# EAGLE board Otherduino5r (EAGLE 7.0.0)
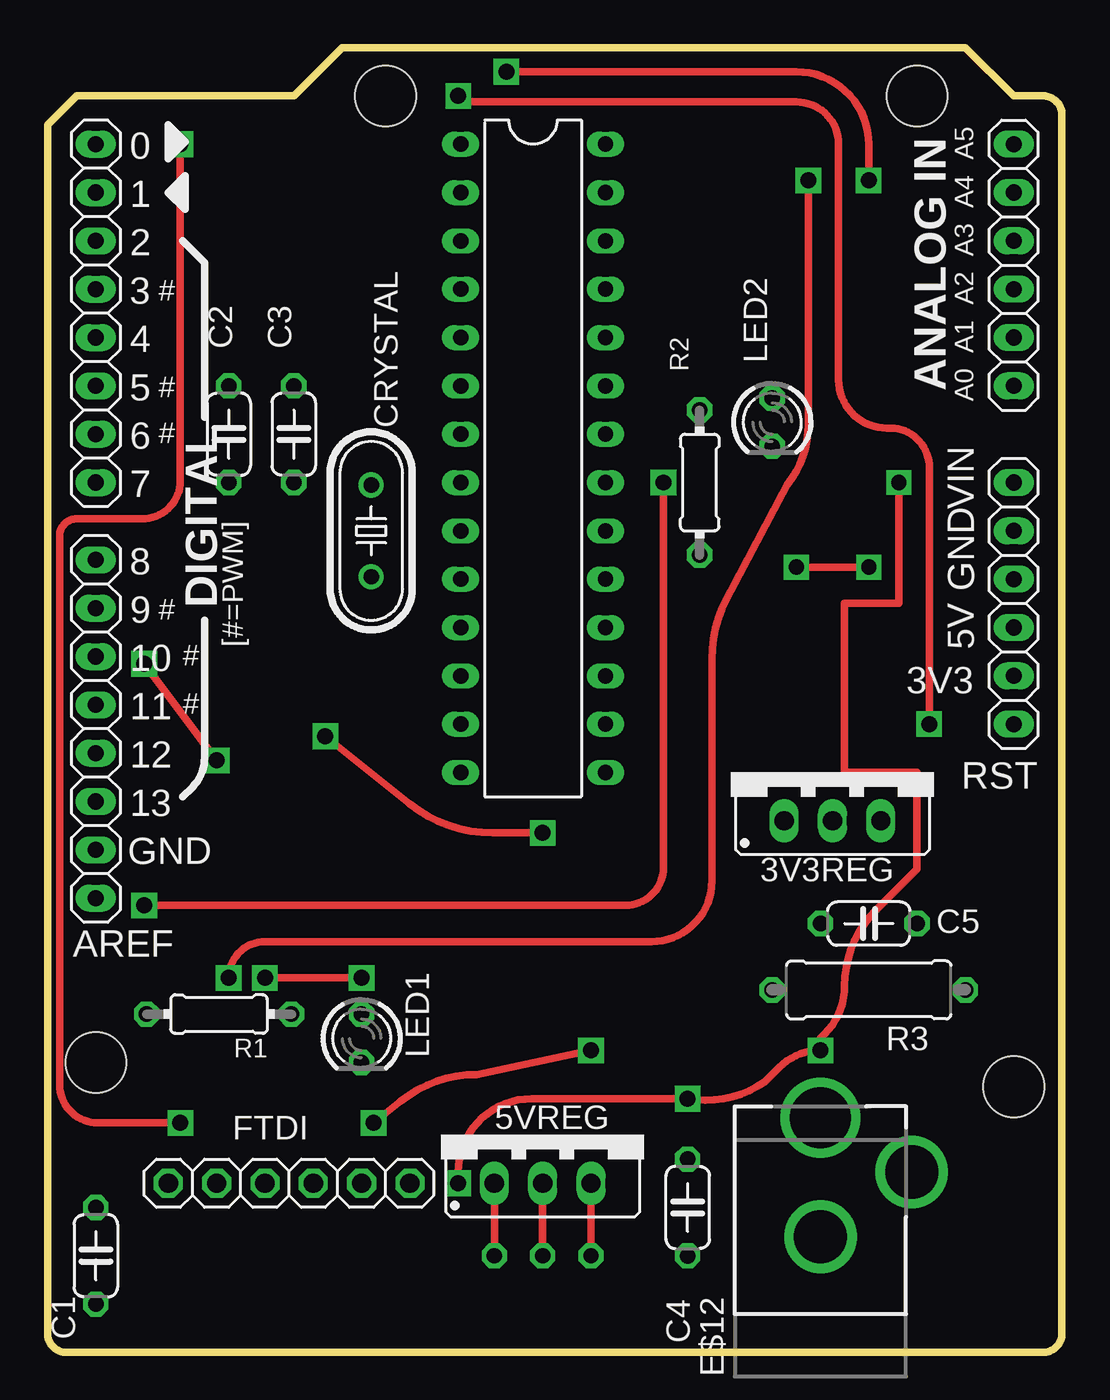
[diagram p0: board, top side]
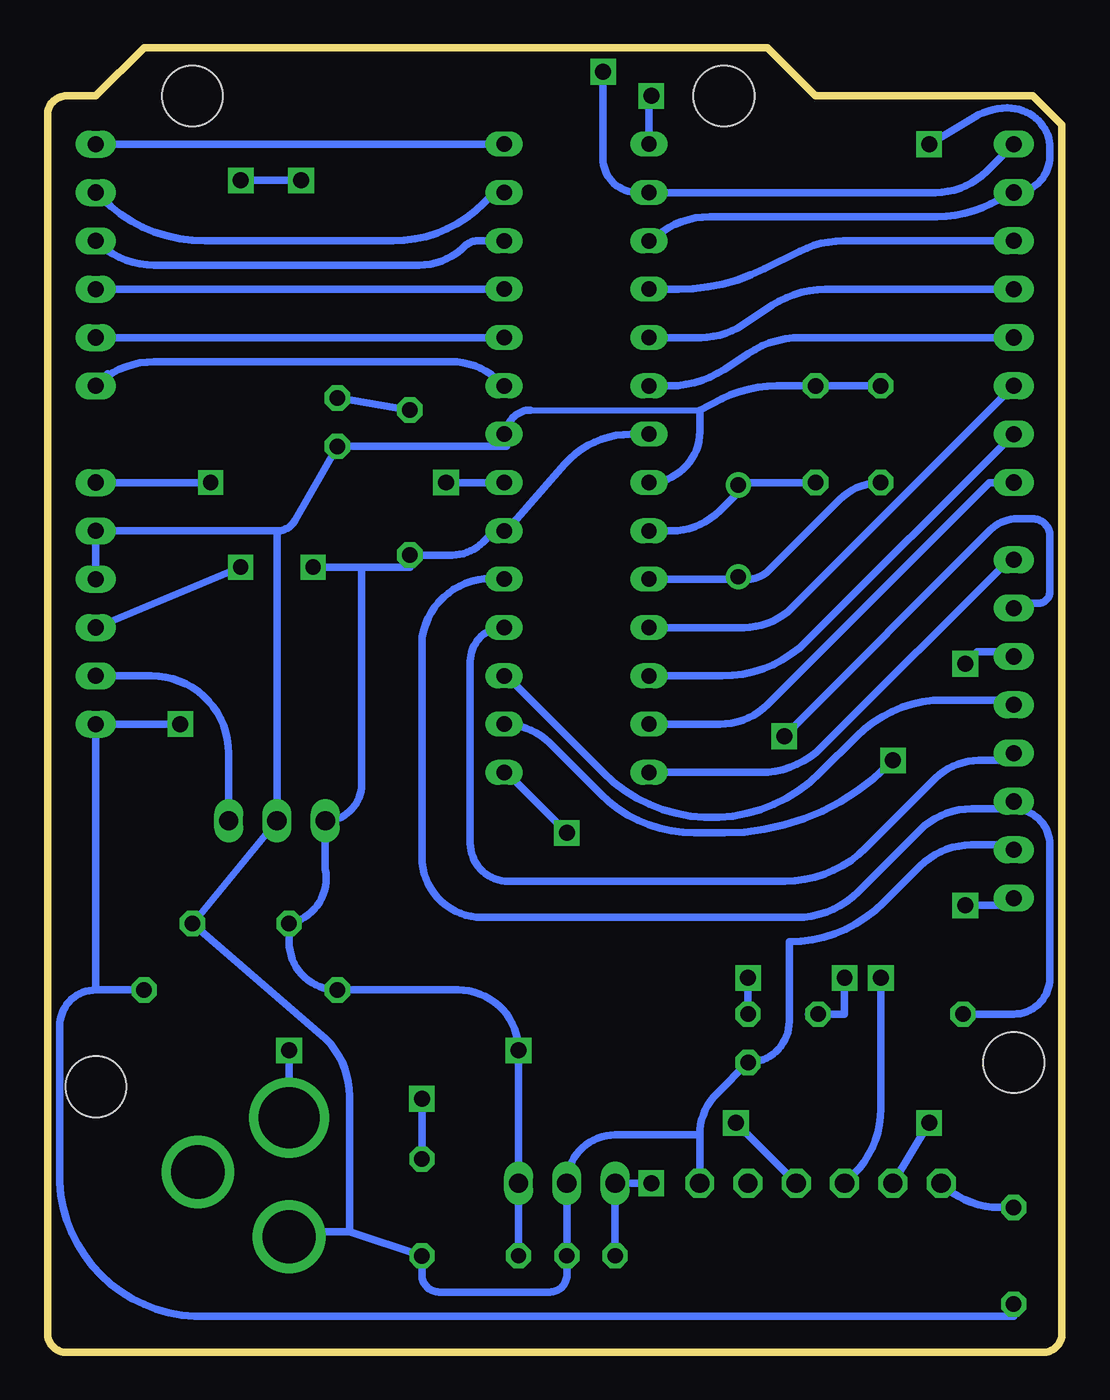
[diagram p1: board, bottom side, seen from below]

Size 53.34 x 68.58 mm. Coordinates in mm from the lower left corner, seen from the top.
Outline: 0,64.52 1.52,66.04 12.95,66.04 15.49,68.58 48.26,68.58 50.8,66.04 52.34,66.04 arc-90 53.34,65.04 53.34,1 arc-90 52.34,0 1,0 arc-90 0,1 0,64.52
Copper layers (1*16): Top 0.035mm / dielectric 1.5mm / Bottom 0.035mm
Design rules "Othermill64th": minimum track width 16mil, minimum drill 33mil, track to track 17mil, track to pad 17mil, pad to pad 17mil, via to via 17mil, smd to smd 0mil, copper to edge 0mil, drill to drill 12mil, minimum pad ring 10mil, minimum via ring 10mil, stop-mask expansion 1mil, vias tented up to drill 30mil, thermal gap 10mil
Net classes: 0 default: width 0.254 mm, clearance 0.254 mm; 1 power: width 0.61 mm, drill 0.61 mm, clearance 0.254 mm; 2 gnd: width 0.305 mm, drill 0.559 mm, clearance 0.254 mm; 3 usbvcc: width 0.508 mm, drill 0.61 mm, clearance 0.254 mm; 4 aref: width 0.406 mm, drill 0.61 mm, clearance 0.254 mm
Holes 3.2 mm at 50.8,13.97 2.54,15.24 17.78,66.04 45.72,66.04
tRestrict: area 1.4,23.1 to 3.7,24.6; area 1.4,25.7 to 3.7,27.2; area 1.4,28.2 to 3.7,29.7; area 1.4,30.7 to 3.7,32.3; area 1.4,30.7 to 3.7,32.3; area 1.4,33.3 to 3.7,34.8; area 1.4,35.8 to 3.7,37.3; area 1.4,38.4 to 3.7,39.9; area 1.4,40.9 to 3.7,42.4; area 1.4,45 to 3.7,46.5; area 1.4,45 to 3.7,46.5; area 1.4,47.5 to 3.7,49; 87 more areas

## Footprints (pad centres in the part's own frame; a part is rotated, then mirrored left to right if it is on the bottom)
78XXS = drill 1.016 long: GND 0,-2.54; IN -2.54,-2.54; OUT 2.54,-2.54
1X06 = drill 0.85 pad 1.422 long: 1 -6.35,0; 2 -3.81,0; 3 -1.27,0; 4 1.27,0; 5 3.81,0; 6 6.35,0
C050-024X044 = drill 0.813 octagon: 1 -2.54,0; 2 2.54,0
HC49/S = drill 0.813: 1 -2.413,0; 2 2.413,0
DCJACK_2MM_PTH = drill 2.8: GND 0,7.35; GNDBREAK 4.8,10.75 | drill 3.2: PWR 0,13.6
1X06' = drill 1.016 octagon: 1 -6.35,0; 2 -3.81,0; 3 -1.27,0; 4 1.27,0; 5 3.81,0; 6 6.35,0
1X08 = drill 0.85 pad 1.422 long: 1 -8.89,0; 2 -6.35,0; 3 -3.81,0; 4 -1.27,0; 5 1.27,0; 6 3.81,0; 7 6.35,0; 8 8.89,0
LED3MM = drill 0.813 octagon: A -1.27,0; K 1.27,0
0204/7 = drill 0.813 octagon: 1 -3.81,0; 2 3.81,0
0309/10 = drill 0.813 octagon: 1 -5.08,0; 2 5.08,0
DIL28-3 = drill 0.813 long: 1 -16.51,-3.81; 2 -13.97,-3.81; 3 -11.43,-3.81; 4 -8.89,-3.81; 5 -6.35,-3.81; 6 -3.81,-3.81; 7 -1.27,-3.81; 8 1.27,-3.81; 9 3.81,-3.81; 10 6.35,-3.81; 11 8.89,-3.81; 12 11.43,-3.81; 13 13.97,-3.81; 14 16.51,-3.81; 15 16.51,3.81; 16 13.97,3.81; 17 11.43,3.81; 18 8.89,3.81; 19 6.35,3.81; 20 3.81,3.81; 21 1.27,3.81; 22 -1.27,3.81; 23 -3.81,3.81; 24 -6.35,3.81; 25 -8.89,3.81; 26 -11.43,3.81; 27 -13.97,3.81; 28 -16.51,3.81

## Placement (x,y rotation side)
3V3REG  [78XXS]  41.27,30.48 0 top
5VREG  [78XXS]  26.04,11.43 0 top
AD  6x1F-H8.5  [1X06]  50.8,57.15 90 top
AD1  6x1F-H8.5  [1X06]  50.8,39.37 90 top
C1  0.1uF  [C050-024X044]  2.54,5.08 90 top
C2  22pF  [C050-024X044]  9.52,48.26 90 top
C3  22pF  [C050-024X044]  12.95,48.26 90 top
C4  10uF  [C050-024X044]  33.66,7.62 270 top
C5  10uF  [C050-024X044]  43.18,22.54 0 top
CRYSTAL  16MHz  [HC49/S]  17.02,43.18 270 top
E$12  [DCJACK_2MM_PTH]  40.64,-1.27 0 top
FTDI  [1X06']  12.7,8.89 180 top
IOL  8x1F-H8.5  [1X08]  2.54,54.61 270 top
IOL1  8x1F-H8.5  [1X08]  2.54,32.77 270 top
LED1  [LED3MM]  16.51,16.51 270 top
LED2  [LED3MM]  38.1,48.9 270 top
R1  220  [0204/7]  9.02,17.78 180 top
R2  220  [0204/7]  34.29,45.72 270 top
R3  10k  [0309/10]  43.18,19.05 0 top
ZU4  ATMEGA328P-PU  [DIL28-3]  25.53,46.99 270 top

## Library data of the parts
3V3REG 5VREG = v-reg
AD AD1 IOL IOL1 = SmartPrj
C1-C5 CRYSTAL E$12 FTDI R3 ZU4 = adafruit
LED1 LED2 = led
R1 R2 = rcl

## Nets
S$1: LED1.A R1.1
S$2: IOL.3 ZU4.4
S$4: FTDI.5 IOL.2 ZU4.3
S$5: IOL.4 ZU4.5
S$6: IOL.5 ZU4.6
S$9: C3.1 CRYSTAL.1 ZU4.9
S$10: 3V3REG.OUT AD1.2
S$11: 5VREG.IN AD1.6 C4.1 E$12.PWR
S$14: C2.1 CRYSTAL.2 ZU4.10
S$16: IOL.7 ZU4.12
S$17: IOL.8 ZU4.13
S$18: IOL1.1 ZU4.14
S$19: IOL1.2 ZU4.15
S$20: IOL1.3 ZU4.16
S$21: IOL1.4 ZU4.17
S$22: IOL1.5 ZU4.18
S$23: IOL1.6 R1.2 ZU4.19
S$24: AD.1 ZU4.23
S$25: AD.2 ZU4.24
S$26: AD.3 ZU4.25
S$27 [gnd]: 3V3REG.GND 5VREG.GND AD1.4 AD1.5 C2.2 C3.2 C4.2 C5.2 E$12.GND FTDI.1 IOL1.7 LED1.K LED2.K ZU4.8
S$28: AD.4 ZU4.26
S$29: AD.5 ZU4.27
S$30: AD.6 ZU4.28
S$31: IOL.6 ZU4.11
S$32: C1.2 FTDI.6
S$33: 3V3REG.IN 5VREG.OUT AD1.3 C5.1 FTDI.3 R2.2 R3.1 ZU4.7 ZU4.20
S$34: IOL1.8 ZU4.21
S$38: LED2.A R2.1
S$40: AD1.1 C1.1 R3.2 ZU4.1
S$42: FTDI.4 IOL.1 ZU4.2

## Tracks (layer width: path | path; a pad name or v marks a point on that pad's centre or on a via)
S$1  (via drill 0.84)
  Top 0.406: v11.43,19.69 v16.51,19.69
  Bottom 0.406: v16.51,19.69 LED1.A | v11.43,19.69 11.43,17.78 R1.1 13.34,17.78
S$2
  Bottom 0.406: ZU4.4 20.18,55.88 arc-27 15.64,56.95 13.77,57.88 arc27 11.5,58.42 IOL.3
S$4  (via drill 0.84)
  Top 0.406: v6.99,12.07 2.64,12.07 arc-90 0.63,14.07 0.63,42.92 arc-90 1.53,43.81 4.98,43.81 arc90 6.99,45.82 v6.99,63.5
  Bottom 0.406: ZU4.3 21.59,58.42 arc45 18.52,59.69 6.58,59.69 arc-27 3.74,60.36 IOL.2 arc-90 0.63,62.87 0.63,63.3 arc-45 1.22,64.72 arc-45 2.87,65.4 arc-31 4.62,64.92 v6.99,63.5 | v6.99,12.07 FTDI.5
S$5
  Bottom 0.406: ZU4.5 19,53.34 arc-34 16.77,54.02 15.25,55.03 arc34 12.43,55.88 IOL.4
S$6
  Bottom 0.406: ZU4.6 20.64,50.8 arc-34 17.73,51.68 16.52,52.49 arc34 13.7,53.34 IOL.5
S$9
  Bottom 0.406: ZU4.9 20.54,43.18 arc-45 18,44.23 17.14,45.09 CRYSTAL.1 16.51,45.72 C3.1
S$10
  Bottom 0.406: 3V3REG.OUT 43.81,31.49 arc-90 47.88,35.56 AD1.2
S$11  (via drill 0.8, 0.84)
  Top 0.406: v21.59,8.89 21.59,9.47 arc-90 25.45,13.34 v33.66,13.34 arc45 37.73,14.23 38.47,14.98 arc-45 v40.64,15.88 40.64,16.51 40.86,16.73 arc45 41.91,19.27 arc-45 43.55,23.23 45.72,25.4 45.72,30.48 41.91,30.48 41.91,39.37 44.77,39.37 v44.77,45.72 | 5VREG.IN v23.5,5.08
  Bottom 0.406: v21.59,8.89 5VREG.IN v23.5,5.08 | v33.66,13.34 C4.1 | E$12.PWR v40.64,15.88 | AD1.6 v44.77,45.72
S$14
  Bottom 0.406: ZU4.10 17.14,40.64 CRYSTAL.2 16.51,40.64 arc-45 15.43,41.09 11.69,44.82 arc45 C2.1
S$16
  Bottom 0.406: IOL.7 13.38,37.42 arc45 17.87,35.56 ZU4.12
S$17
  Bottom 0.406: ZU4.13 18,33.02 arc-45 15.46,34.07 3.81,45.72 IOL.8
S$18
  Bottom 0.406: ZU4.14 15.87,30.48 arc-45 12.63,31.82 2.54,41.91 IOL1.1
S$19  (via drill 0.84)
  Top 0.406: v14.61,32.38 19.03,28.84 arc39 23.41,27.3 v26.04,27.3
  Bottom 0.406: v26.04,27.3 29.21,30.48 ZU4.15 | v14.61,32.38 3.76,43.23 arc45 2.34,43.81 1.53,43.81 arc90 0.63,42.92 0.63,40.01 arc90 1.27,39.37 2.54,39.37 IOL1.2
S$20  (via drill 0.84)
  Top 0.406: v5.08,36.2 v8.89,31.12
  Bottom 0.406: ZU4.16 arc45 26.95,32.03 24.28,29.36 arc-45 19.32,27.3 17.75,27.3 arc-45 9.13,30.88 v8.89,31.12 | v5.08,36.2 4.45,36.83 2.54,36.83 IOL1.3
S$21
  Bottom 0.406: ZU4.17 29.21,35.56 24.13,30.48 arc-90 12.7,30.48 10.79,32.39 arc45 6.21,34.29 2.54,34.29 IOL1.4
S$22
  Bottom 0.406: ZU4.18 arc-90 31.12,36.32 31.12,26.77 arc-90 29.11,24.77 14.56,24.77 arc-45 10.3,26.53 6.66,30.17 arc45 4.37,31.12 2.54,31.12 IOL1.5
S$23
  Bottom 0.406: R1.2 2.54,17.78 arc-90 0.63,19.69 0.63,26.67 arc-90 2.54,28.57 | ZU4.19 arc-90 33.66,37.59 33.66,26.04 arc-90 30.48,22.86 13.98,22.86 arc-45 10.71,24.21 7.48,27.44 arc45 4.75,28.57 2.54,28.57 | 2.54,28.57 IOL1.6
S$24
  Bottom 0.406: 50.16,51.44 AD.1 arc45 47.73,52.07 32.13,52.07 arc45 29.53,50.99 ZU4.23
S$25
  Bottom 0.406: AD.2 ZU4.24
S$26
  Bottom 0.406: AD.3 ZU4.25
S$27  (via drill 0.8)
  Top 0.406: 5VREG.GND v26.04,5.08
  Bottom 0.305: 27.94,49.53 19.05,49.53
  Bottom 0.406: 37.47,6.35 40.64,6.35 E$12.GND | 37.47,6.35 C4.2 33.66,4.07 arc-90 32.76,3.17 26.93,3.17 arc-90 26.04,4.07 5VREG.GND arc90 23.5,11.43 19.05,11.43 | 19.05,11.43 arc45 18.15,13.6 LED1.K arc-90 14.34,17.41 14.34,21.59 arc-45 9.37,23.65 7.47,25.55 arc45 4.77,26.67 2.54,26.67 IOL1.7 | FTDI.1 19.05,11.43 | C2.2 C3.2 14.98,50.8 arc-27 17.88,50.12 19.05,49.53 19.05,48.39 arc90 ZU4.8 21.59,45.72 | AD1.4 AD1.5 41.27,43.18 | 27.94,49.53 arc-90 29.21,48.26 29.21,47.62 LED2.K 40.33,43.73 arc60 41.27,43.18 | 41.27,43.18 3V3REG.GND C5.2 38.71,16.49 arc45 37.47,13.48 37.47,6.35
S$28
  Bottom 0.406: ZU4.26 30.73,58.42 arc-45 31.38,58.15 arc45 33.8,57.15 47.73,57.15 arc45 AD.4
S$29
  Bottom 0.406: AD.5 50.52,60.68 arc-45 45.06,58.42 35.18,58.42 arc-45 30.41,60.4 29.84,60.96 ZU4.27
S$30
  Bottom 0.406: AD.6 ZU4.28
S$31
  Bottom 0.406: IOL.6 14.19,39.15 arc45 16.73,38.1 ZU4.11
S$32
  Bottom 0.406: FTDI.6 arc-45 3.28,7.62 C1.2
S$33  (via drill 0.8, 0.84)
  Top 0.406: v28.57,15.88 22.56,14.61 arc39 18.57,13.21 v17.14,12.07 | v43.18,41.27 v39.37,41.27 | 5VREG.OUT v28.57,5.08
  Bottom 0.406: ZU4.7 22.67,48.26 arc-49 26.15,46.68 29.21,43.18 ZU4.20 29.84,43.18 30.44,42.58 arc45 32.06,41.91 R2.2 34.29,41.27 36.83,41.27 | v17.14,12.07 FTDI.3 | AD1.3 v43.18,41.27 | v39.37,41.27 36.83,41.27 | 36.83,41.27 36.83,29.84 arc90 3V3REG.IN 38.73,25.4 arc90 C5.1 40.64,21.59 arc-90 R3.1 31.75,19.05 arc90 v28.57,15.88 5VREG.OUT v28.57,5.08
S$34  (via drill 0.84)
  Top 0.406: v5.08,23.5 30.38,23.5 arc90 32.38,25.5 v32.38,45.72
  Bottom 0.406: v32.38,45.72 ZU4.21 | v5.08,23.5 2.54,23.5 IOL1.8
S$38
  Bottom 0.406: R2.1 LED2.A
S$40  (via drill 0.84)
  Top 0.406: v21.59,66.04 21.59,65.72 39.37,65.72 arc-90 41.59,63.5 41.59,51.12 arc90 44.13,48.58 arc-90 46.36,46.67 v46.36,33.02
  Bottom 0.406: 50.8,19.05 R3.2 | 50.8,19.05 arc-90 52.7,17.14 52.7,9.64 arc-90 45.61,1.91 2.54,1.91 C1.1 | 50.8,19.05 AD1.1 v46.36,33.02 | v21.59,66.04 21.72,66.04 ZU4.1
S$42  (via drill 0.84)
  Top 0.406: v9.52,19.69 arc-90 11.43,21.59 31.75,21.59 arc90 34.93,24.77 34.93,36.43 arc-28 35.71,39.58 38.88,45.59 arc39 40.01,48.79 v40.01,61.6 | v24.13,67.31 39.37,67.31 arc-90 43.18,63.5 v43.18,61.6
  Bottom 0.406: IOL.1 3.96,62.08 arc45 6.66,60.96 ZU4.2 22.33,60.96 arc90 24.13,62.76 v24.13,67.31 | v9.52,19.69 9.52,12.8 arc45 10.94,9.38 FTDI.4 | v43.18,61.6 v40.01,61.6

## Text on the board
tPlace: 0 | A5 | 1 | A4 | 2 | A3 | 3 | A2 | 4 | A1 | 5 | ANALOG IN | A0 | 6 | 7 | VIN | 8 | GND | 9 | 3V3 | 5V | 10 | 11 | RST | 12 | 13
tNames: # | # | # | # | DIGITAL | # | [#=PWM] | # | GND | AREF
tDocu: Rx | Tx | RST | +5V | GND | Vin | Gnd | +5V
214bmp: D:/SmartProjects/Snc/a4_bn_logo2.bmp